# Altium PCB LED_Board.PcbDoc
Units mil, origin at the board's own origin, x right, y up, seen from the top; angles counter-clockwise.
Board outline 1269.87 x 1539.95 mil, 2 copper layers (Top Layer, Bottom Layer); 11 components, 8 nets, 24 pads, 0 vias.
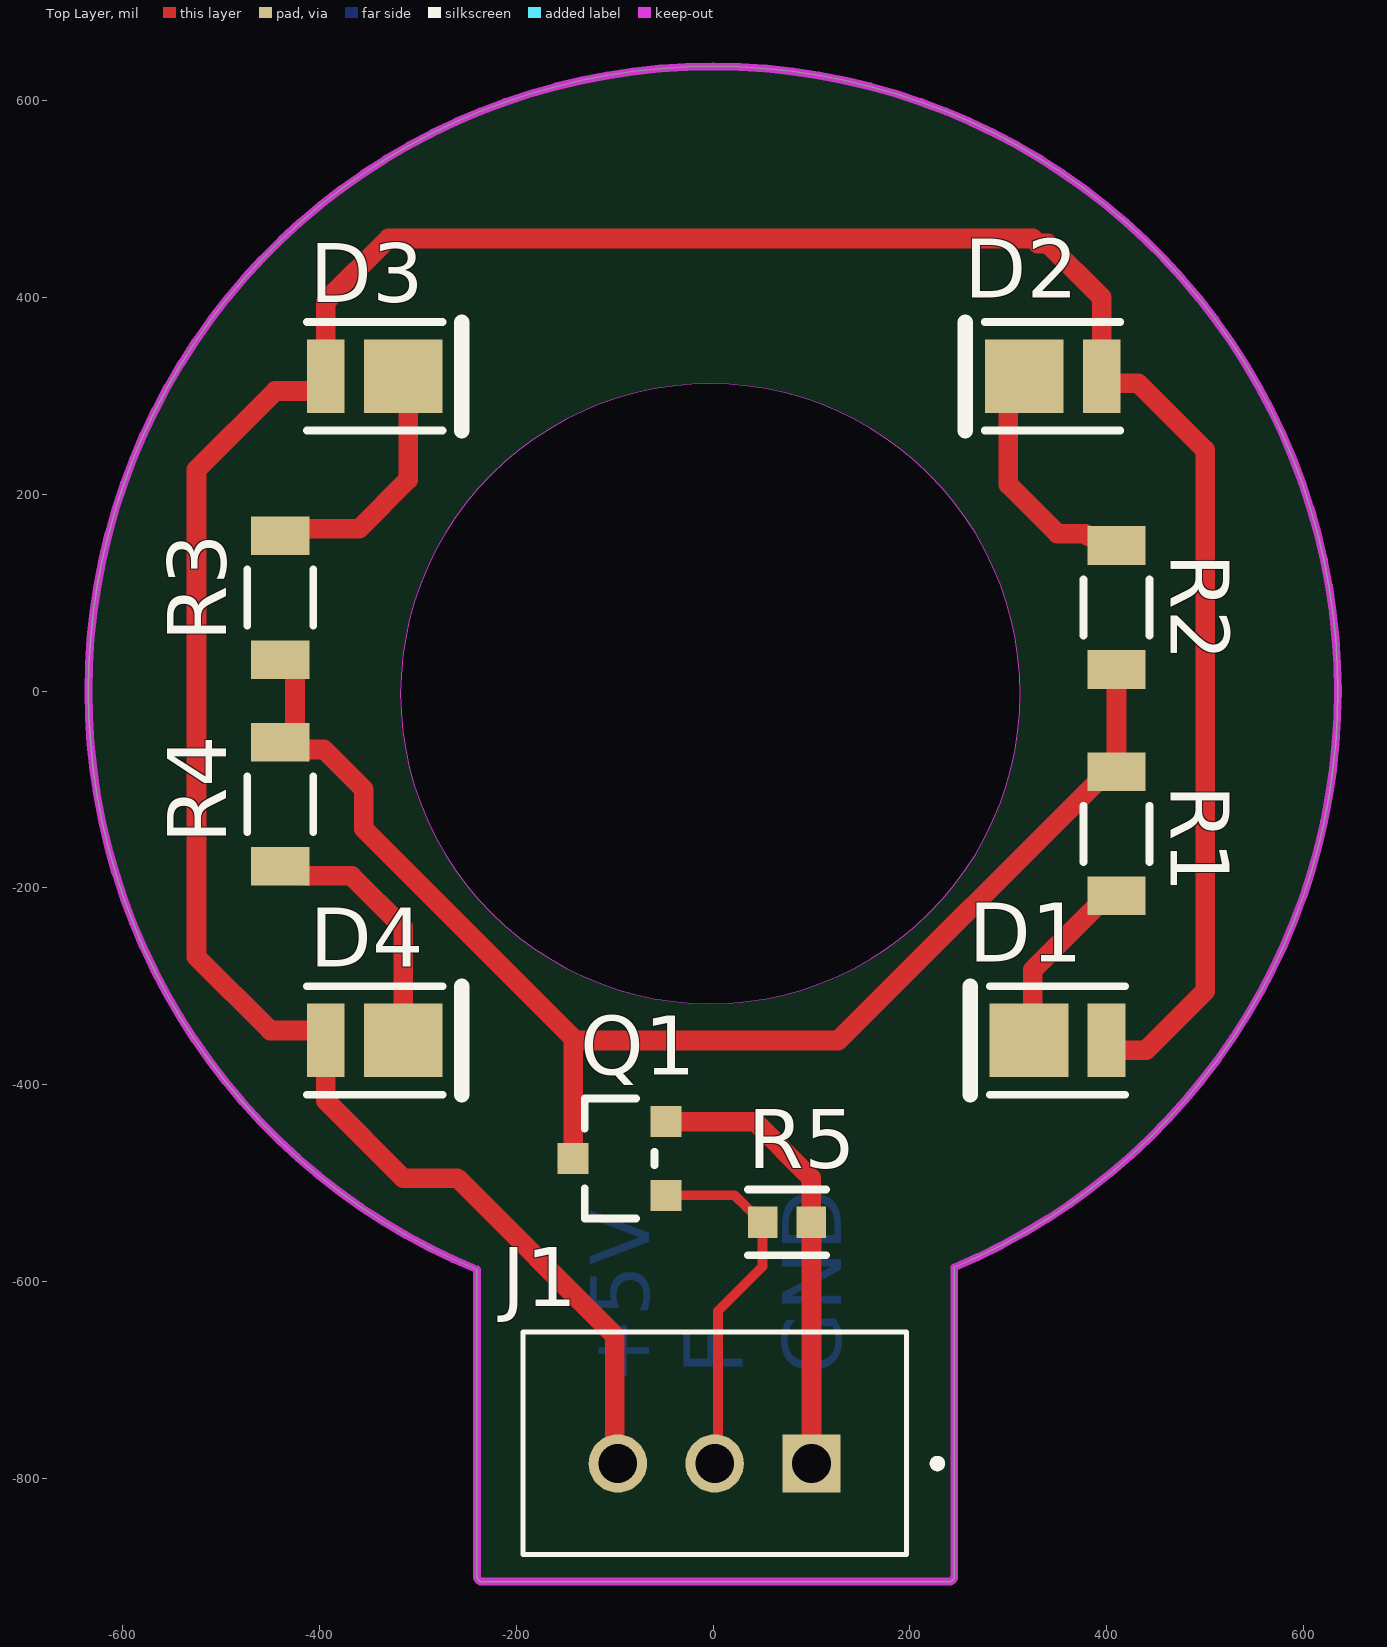
[diagram p0: Top Layer view]
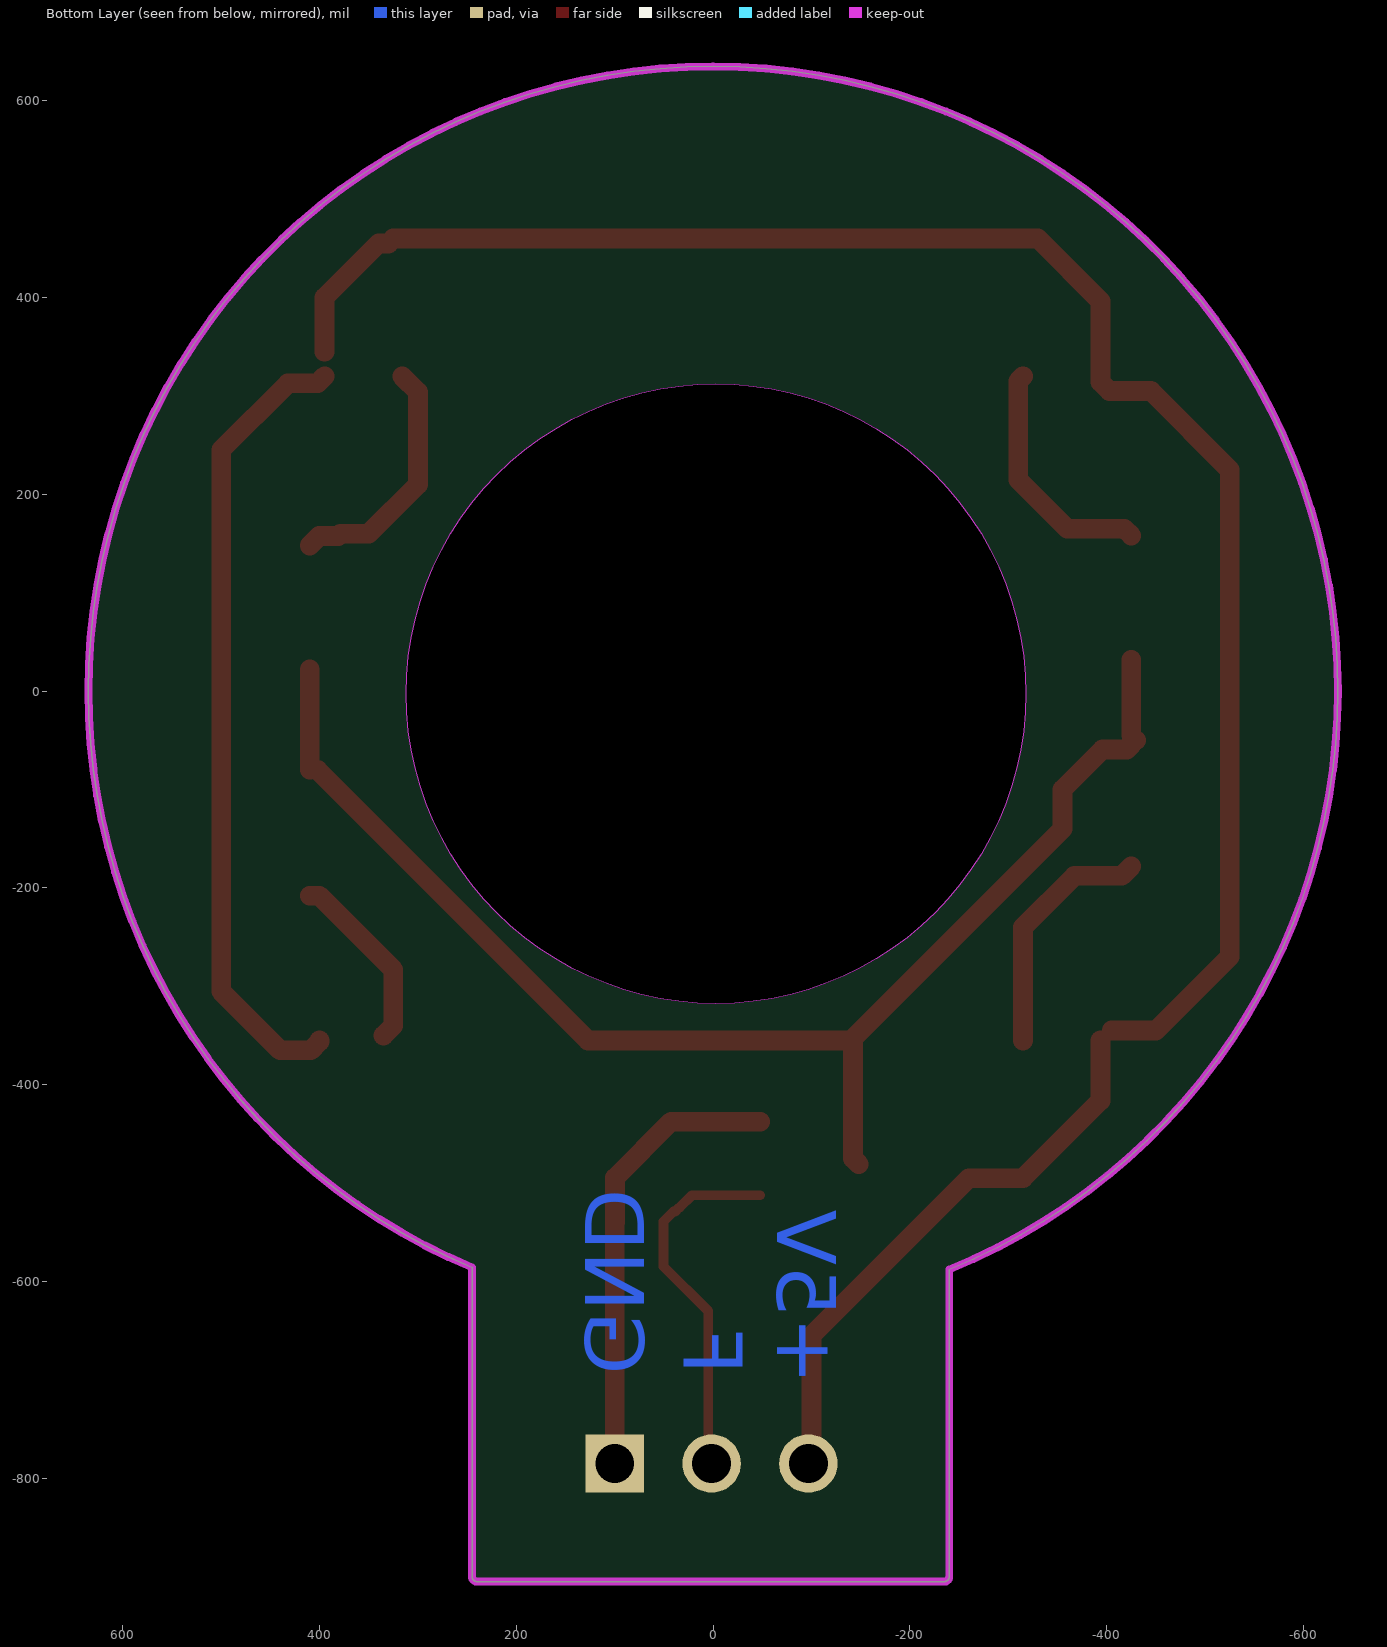
[diagram p1: Bottom Layer view, seen from below]
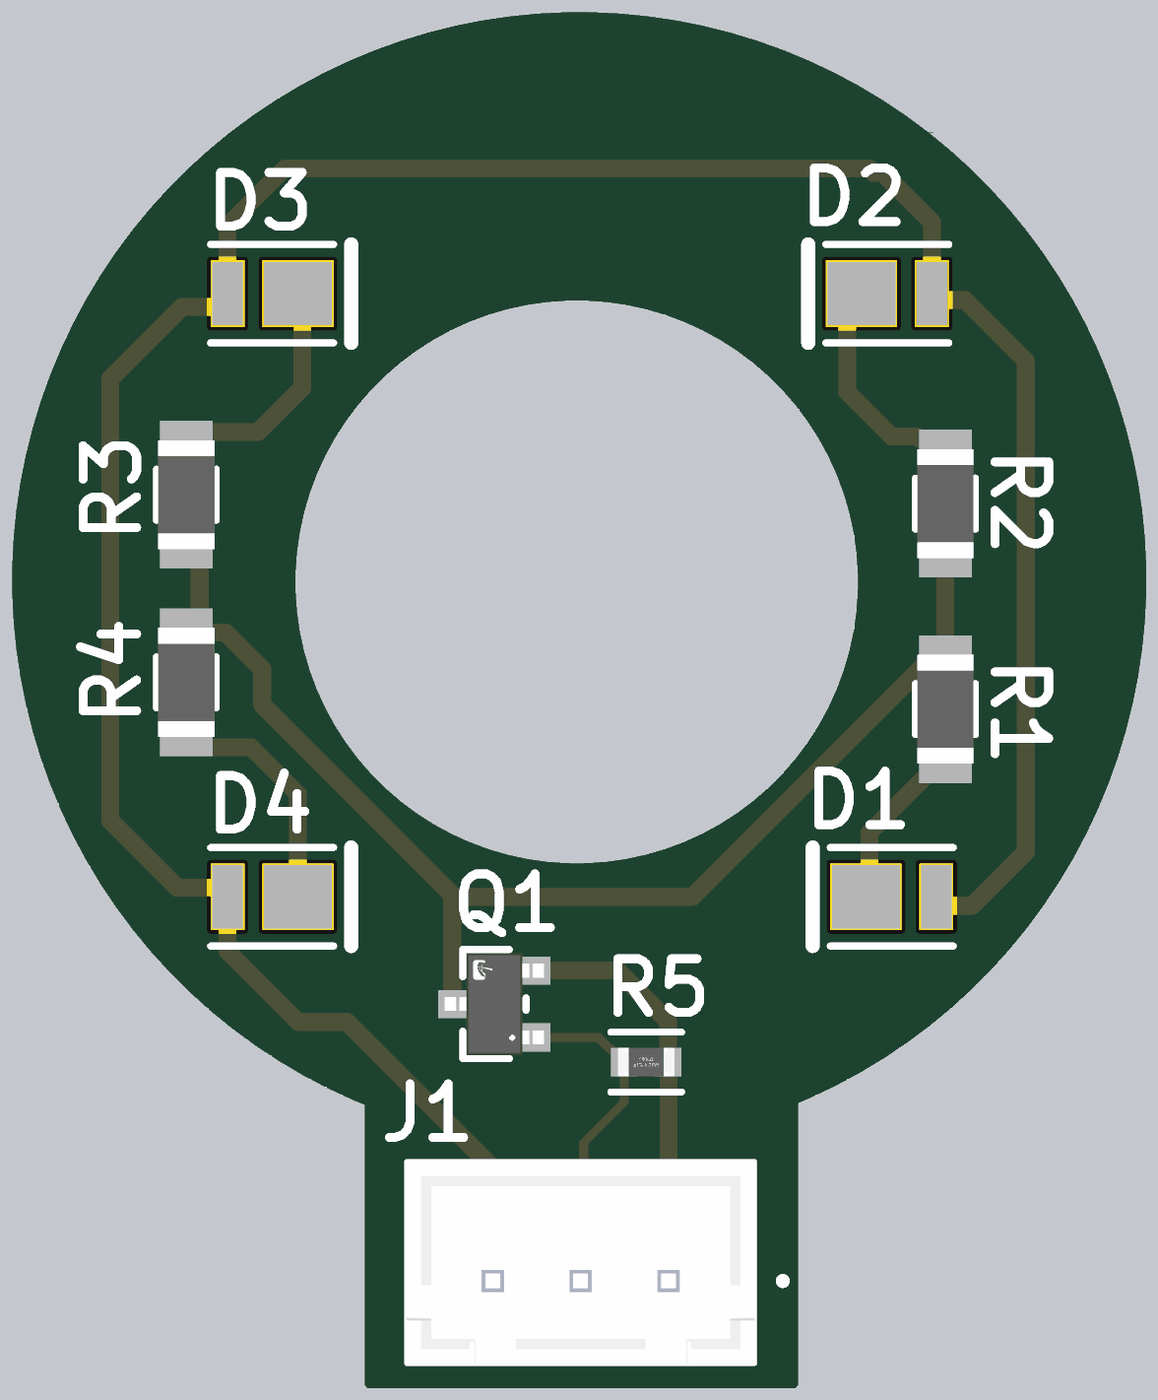
[diagram p2: 3D render of the assembled board from above, using the file's embedded part models]

## Layer stack, top to bottom
Top Solder: solder mask 0.4, Solder Resist, Dk 3.5
Top Layer: signal copper 1.4
Dielectric 1: dielectric 12.6, FR-4, Dk 4.8
Bottom Layer: signal copper 1.4
Bottom Solder: solder mask 0.4, Solder Resist, Dk 3.5

## Board outline
-240.01,-900 -240.01,-587.82 cw(c0,0) -634.94,0 cw(c0,0) 0,634.94 cw(c0,0) 634.94,0 cw(c0,0) 245.02,-585.76 245.02,-900 cw(c240,-900) 240,-905.01 -235,-905.01 cw(c-235,-900)
cut-out: -317.8,-2.63 ccw(c-2.84,-2.63) -2.84,-317.59 ccw(c-2.84,-2.63) 312.12,-2.63 ccw(c-2.84,-2.63) -2.84,312.33 ccw(c-2.84,-2.63)

## Design rules (kind name [scope] priority, off if disabled: settings)
Clearance [All] p1: gap=10 ignorepadtopadclearanceinfootprint=FALSE
PolygonConnect [All] p1: connectstyle=Relief reliefconductorwidth=10 reliefentries=4 polygonreliefangle="90 Angle" airgapwidth=10
RoutingVias [All] p1: holewidth=28 width=50 viastyle="Through Hole" minholewidth=28 minwidth=50 maxholewidth=28 maxwidth=50
SolderMaskExpansion [All] p1: expansion=4 istentingtop=FALSE
SupplyNets "Schematic Supply Nets" [InNet('GND')] p1: voltage=0.000
Width [All] p1: maxlimit=50 minlimit=10 preferedwidth=10 minimp=50.000000 maximp=50.000000 favimp=50.000000
30 further rules are at their usual default settings.

## Components (designator, comment, footprint, x,y, rotation, side; value= is the part's Value field where it differs from the comment)
D1 "LED1" LUMD-L128_V 350,-355 r0 top
D2 "LED2" LUMD-L128_V 345,320 r0 top
D3 "LED3" LUMD-L128_V -343.94,320 r180 top
D4 "LED4" LUMD-L128_V -343.94,-355 r180 top
J1 "3-Pin Header" JST_B3B-XH-A 1.57,-764.33 r0 top
Q1 "NPN" FP-SOT23-MFG -95,-475 r180 top
R1 "22" FP-SR1206-MFG 410,-145 r90 top value=22Ω
R2 "22" FP-SR1206-MFG 410,85 r270 top value=22Ω
R3 "22" FP-SR1206-MFG -440,95 r270 top value=22Ω
R4 "22" FP-SR1206-MFG -440,-115 r90 top value=22Ω
R5 "100k" FP-CRGP0603-IPC_C 75,-540 r0 top value=100KΩ

## Footprints (in the part's own frame and the unit in brackets; to place one, negate y for a bottom-side part, rotate by r counter-clockwise, add the part's x,y. Pads: shape width x height; smd on the part's side, far side on the other; paste and mask are expansions set on the pad)
FP-CRGP0603-IPC_C [mil]
  rect 29.85x31.97 smd paste+0 mask+0: 1(-24.68,0) 2(24.68,0)
  silkscreen extent -40,-33 40,33, body extent -44,-22 44,22, height 10
FP-SOT23-MFG [mm]
  rect 0.8x0.8 smd paste+0 mask+0: 1(-1.2,0.95) 2(-1.2,-0.95) 3(1.2,0)
  silkscreen extent -0.9,-1.55 0.9,1.55, body extent -1.7,-1.78 1.7,1.78, height 0.25
FP-SR1206-MFG [mm]
  rect 1x1.5 smd paste+0 mask+0: 1(-1.6,0) 2(1.6,0)
  silkscreen extent -0.72,-0.85 0.72,0.85, body extent -2.2,-0.95 2.2,0.95, height 0.25
JST_B3B-XH-A [mm]
  rect 1.508x1.508 / inner round 1.508 / far side rect 1.508x1.508 hole 1: 1(2.5,-0.525)
  round 1.508 hole 1: 2(0,-0.525) 3(-2.5,-0.525)
  silkscreen extent -4.95,-2.88 5.85,2.88, body extent -4.95,-2.88 4.95,2.88, height 7
LUMD-L128_V [mm] "SMD, 2-Leads, Body 2.8x3.5mm"
  rect 2.03x1.9 smd paste-0.05: 1(-0.735,0)
  rect 0.97x1.9 smd paste-0.05: 2(1.265,0)
  silkscreen extent -2.25,-1.4 1.75,1.4, body extent -1.75,-1.4 1.75,1.4, height 0.75

## Part data
D1 D2 D3 D4: library part CMP-2100-03745-1, "LUXEON 2835 Line, Voltage 9 V, Nominal CCT 2700K, Luminous Flux 75 Im, -40 to 105 degC, 2-Pin SMD, RoHS, Tape and Reel", Manufacturer=Lumileds, Package Description="2-Pin Surface Mount Device, Body 2.8 x 3.5 mm", Package Reference=L128, Test Current="60 mA", Voltage="9 V", Datasheet URL=https://www.lumileds.com/uploads/603/DS216-pdf, Datasheet Version=42979, Manufacturer URL=https://www.lumileds.com, Min CRI=80, Min Luminous Flux="67 Im", Mounting Technology=SurfaceMount, Nominal CCT=2700K, Typical Luminous Efficacy="137 Im/w", Typical Luminous Flux="75 Im"
J1: library part B3B-XH-A, "Connector Header Through Hole 3 position 0.098 (2.50mm)", Package=None, Check_prices=https://www.snapeda.com/parts/B3B-XH-A/JST+Sales+America+Inc./view-part/?ref=eda, MF="JST Sales", MP=B3B-XH-A, SnapEDA_Link=https://www.snapeda.com/parts/B3B-XH-A/JST+Sales+America+Inc./view-part/?ref=snap
Q1: library part CMP-83955-000006-1, "MOSFET N-CH 30V 5.7A SOT23", Case/Package=SOT-23, Continuous Drain Current (ID)=5.7A, Drain to Source Voltage (Vdss)=30V, Gate to Source Voltage (Vgs)=12V, Input Capacitance=630pF, Max Operating Temperature=150°C, Max Power Dissipation=1.4W, Min Operating Temperature=-55°C, Lead Free="Lead Free", Mount="Surface Mount", Number of Elements=1, Number of Pins=3, Packaging="Tape and Reel", Power Dissipation=1.4W, Radiation Hardening=No, Rds On Max=26.5mR
R1 R2 R3 R4: library part CMP-03412-023562-1, "RES 22 OHM 1% 1/2W 1206", Manufacturer=Yageo, Manufacturer Part Number=SR1206FR-7W22RL, Package=SR1206, Power Rating=0.5W, Resistance=22Ω, Temperature="-55°C to +155°C", Temperature Range High=+155°C, Temperature Range Low=-55°C, Tolerance=0.01, Voltage Rating=200V, Automotive=Yes, Automotive Grade="Grade 0", Category=Res, ComponentLink2Description=Datasheet, ComponentLink2URL=http://www.yageo.com/documents/recent/PYu-SR_D_F%20tol_RoHS_L_3.pdf, Composition="Thick Film", Device Class L1="Passive Components", Device Class L2=Resistors, Device Class L3="Chip SMD Resistors", Digikey Description="RES 22 OHM 1% 1/2W 1206", Footprint Url=http://www.yageo.com/exep/pages/download/literatures/PYu-R_Mount_10.pdf, Height=0.65mm, Ipc Land Pattern Name=RESC310160X55, Lead Free=Yes, Octopart=https://octopart.com/sr1206fr-7w22rl-yageo-92673882, RoHS=TRUE, Series=SR
R5: library part CMP-03211-000885-1, "CRGP 0603 100K 1%", Ambient Temperature Range High=+70°C, Manufacturer=TE, Manufacturer Part Number=CRGP0603F100K, Package=CRGP0603, Power Rating=0.25W, Resistance=100KΩ, Temperature="-55°C to +155°C", Temperature Coefficient=±100ppm/°C, Temperature Range High=+155°C, Temperature Range Low=-55°C, Tolerance=0.01, Voltage Rating=50V, Automotive=No, Category=Res, ComponentLink2Description=Datasheet, ComponentLink2URL=https://www.te.com/commerce/DocumentDelivery/DDEController?Action=srchrtrv&DocNm=9-1773463-9&DocType=DS&DocLang=English, Composition="Thick Film", Device Class L1="Passive Components", Device Class L2=Resistors, Device Class L3="Chip SMD Resistors", Digikey Description="CRGP 0603 100K 1%", Height=0.55mm, Ipc Land Pattern Name=RESC16080X45, Lead Free=Yes, Octopart=https://octopart.com/crgp0603f100k-te+connectivity-91018719, RoHS=TRUE, Series=CRGP

## Nets (pads, with @x,y where several pads share a name; then routed paths per layer and width w, separated by ;. In a path a pad name is that pad's centre, name@x,y a point inside that pad or via, vN(x,y) a via of type N, cw(c..) or ccw(c..) an arc to the next point about the centre after c; other vN are vias at no path point)
GND: J1.1 Q1.2 R5.2 | length 458.2
  Top Layer w20: Q1.2 42.6,-437.6 99.68,-494.68 R5.2 ; R5.2@100,-540.32 100,-775 J1.1@105,-780
NetD1_1: D1.1 R1.1 | length 187.1
  Top Layer w20: D1.1@335,-350 325,-340 325,-283.15 400.16,-207.99 R1.1
NetD1_2: D1.2 D2.2 D3.2 D4.2 J1.3 | length 3198.7
  Top Layer w20: D4.2@-405,-345 -450,-345 -525,-270 -525,225 -445,305 -402.83,305 -393.74,314.09 D3.2 -393.74,396.26 -330,460 325,460 330,455 340,455 395,400 D2.2@395,345 ; D4.2 -393.74,-416.26 -315,-495 -260,-495 -100,-655 -100,-766.81 J1.3@-81.81,-785 ; D2.2 401.98,312.82 432.18,312.82 500,245 500,-305 440,-365 408.9,-365 400,-356.1 D1.2@400,-355
NetD2_1: D2.1 R2.1 | length 252.3
  Top Layer w20: D2.1 300,303.94 300,210 350,160 378.76,160 381.08,157.68 400.31,157.68 R2.1
NetD3_1: D3.1 R3.1 | length 245.7
  Top Layer w20: R3.1@-425,157.99 -417.99,165 -360,165 -310,215 -310,315 D3.1
NetD4_1: D4.1 R4.1 | length 250.7
  Top Layer w20: R4.1@-425,-177.99 -415.31,-187.68 -367.32,-187.68 -315,-240 D4.1
NetJ1_2: J1.2 Q1.1 R5.1 | length 348.9
  Top Layer w10: Q1.1 21.65,-512.4 34.25,-525 34.53,-525 38.55,-529.01 40.39,-529.01 50.32,-538.94 50.32,-584.68 5,-630 J1.2@5,-760
NetQ1_3: Q1.3 R1.2 R2.2 R3.2 R4.2 | length 1410.9
  Top Layer w20: R4.2@-430,-50 -425,-45 R3.2@-425,32.01 ; R4.2@-425,-52.01 -425,-54.8 -420.47,-59.32 -395.68,-59.32 -355,-100 -355,-140 -140,-355 127.17,-355 402.17,-80 R1.2@405,-80 ; Q1.3@-147.99,-480.75 Q1.3 -142.24,-352.76 ; R1.2@410,-80 R2.2

## Polygon pours and split planes (outlines as drawn)
no net on Keep-Out Layer (none, remove dead copper): -240.01,-900 -240.01,-587.82 cw(c0,0) -634.94,0 cw(c0,0) 0,634.94 cw(c0,0) 634.94,0 cw(c0,0) 245.02,-585.76 245.02,-900 cw(c240,-900) 240,-905.01 -235,-905.01 cw(c-235,-900)

## Other copper
Bottom Layer:
  text "F" at 30,-695 h60 r90
  text "GND" at 130,-695 h60 r90
  text "+5V" at -65,-705 h60 r90

## Silkscreen, mask and mechanical layers (free items; w line width, h text height)
Mechanical 1:
  circle w10: c0,0 r629.92
  circle w10: c0,0 r314.96
  lines w10: -235,-545 -235,-900 240,-900 240,-540